# Altium PCB Xds100v2EmuMini.PcbDoc
Units mil, origin at the board's own origin, x right, y up, seen from the top; angles counter-clockwise.
Board outline 1419 x 798.73 mil, 4 copper layers (Top Layer, GND, POWER, Bottom Layer), stack 62.967 mil thick; 42 components, 43 nets, 175 pads, 90 vias.
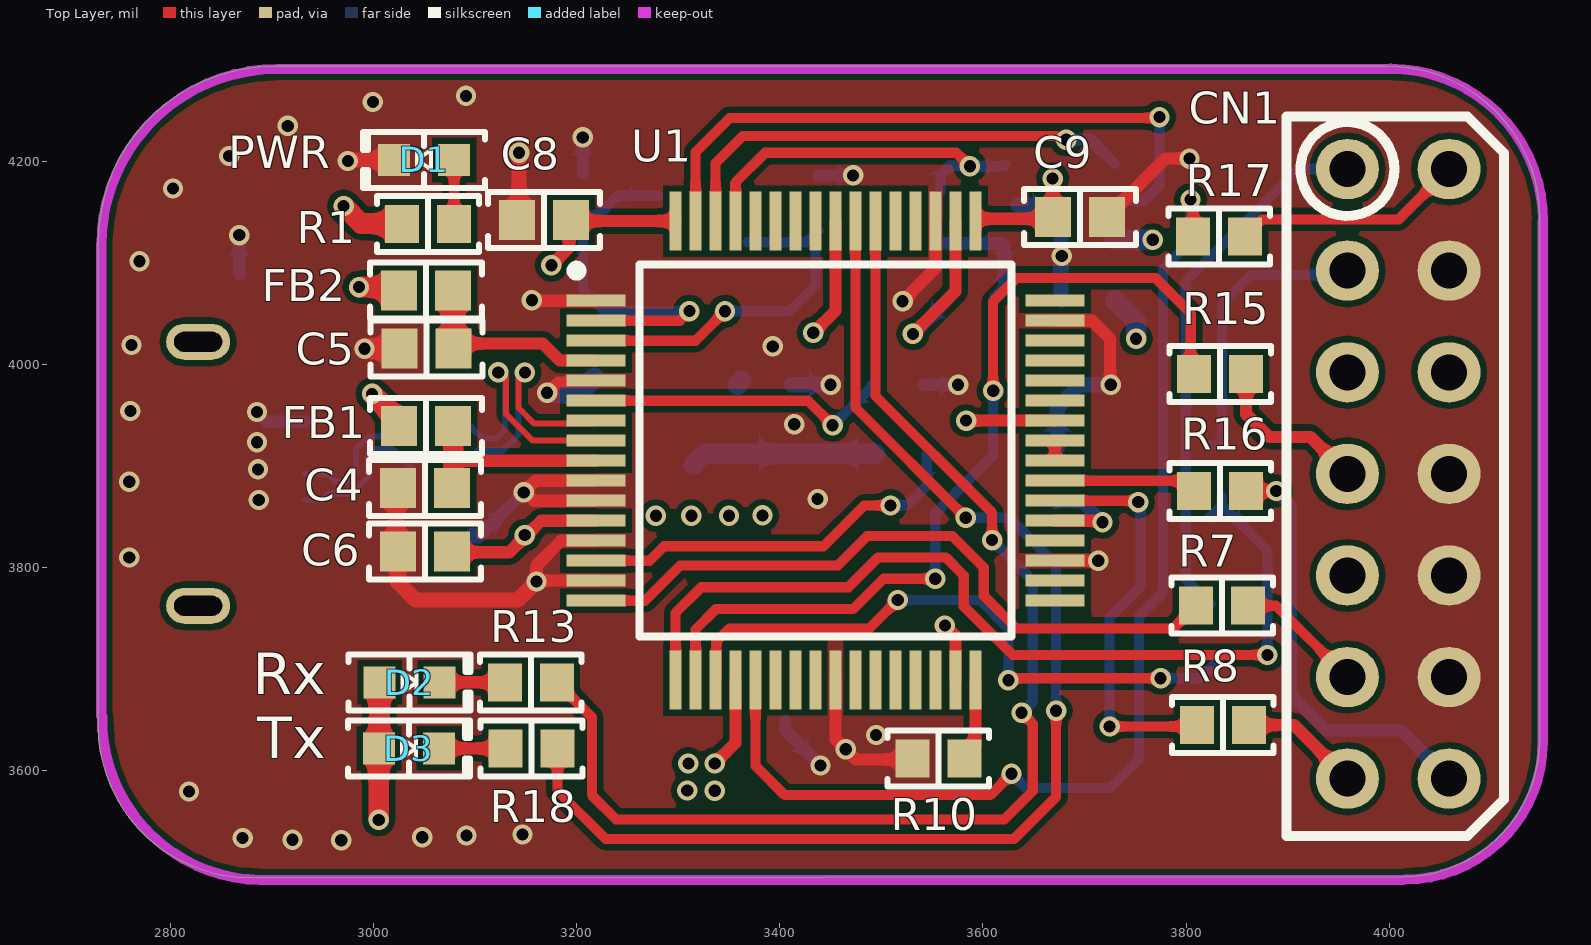
[diagram p0: Top Layer view]
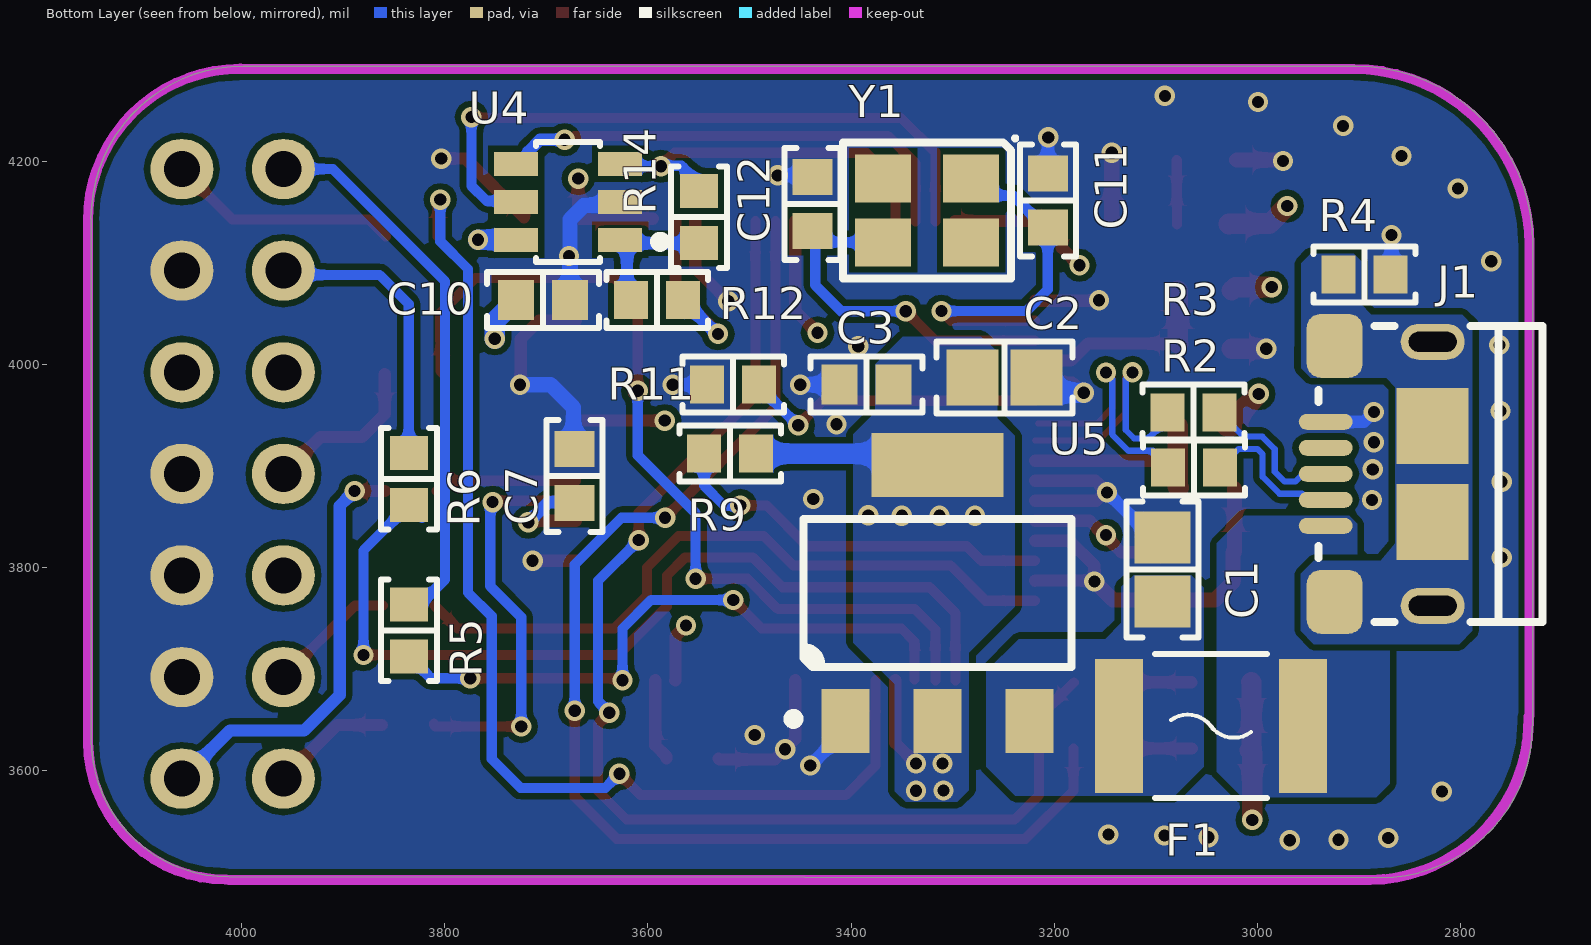
[diagram p1: Bottom Layer view, seen from below]
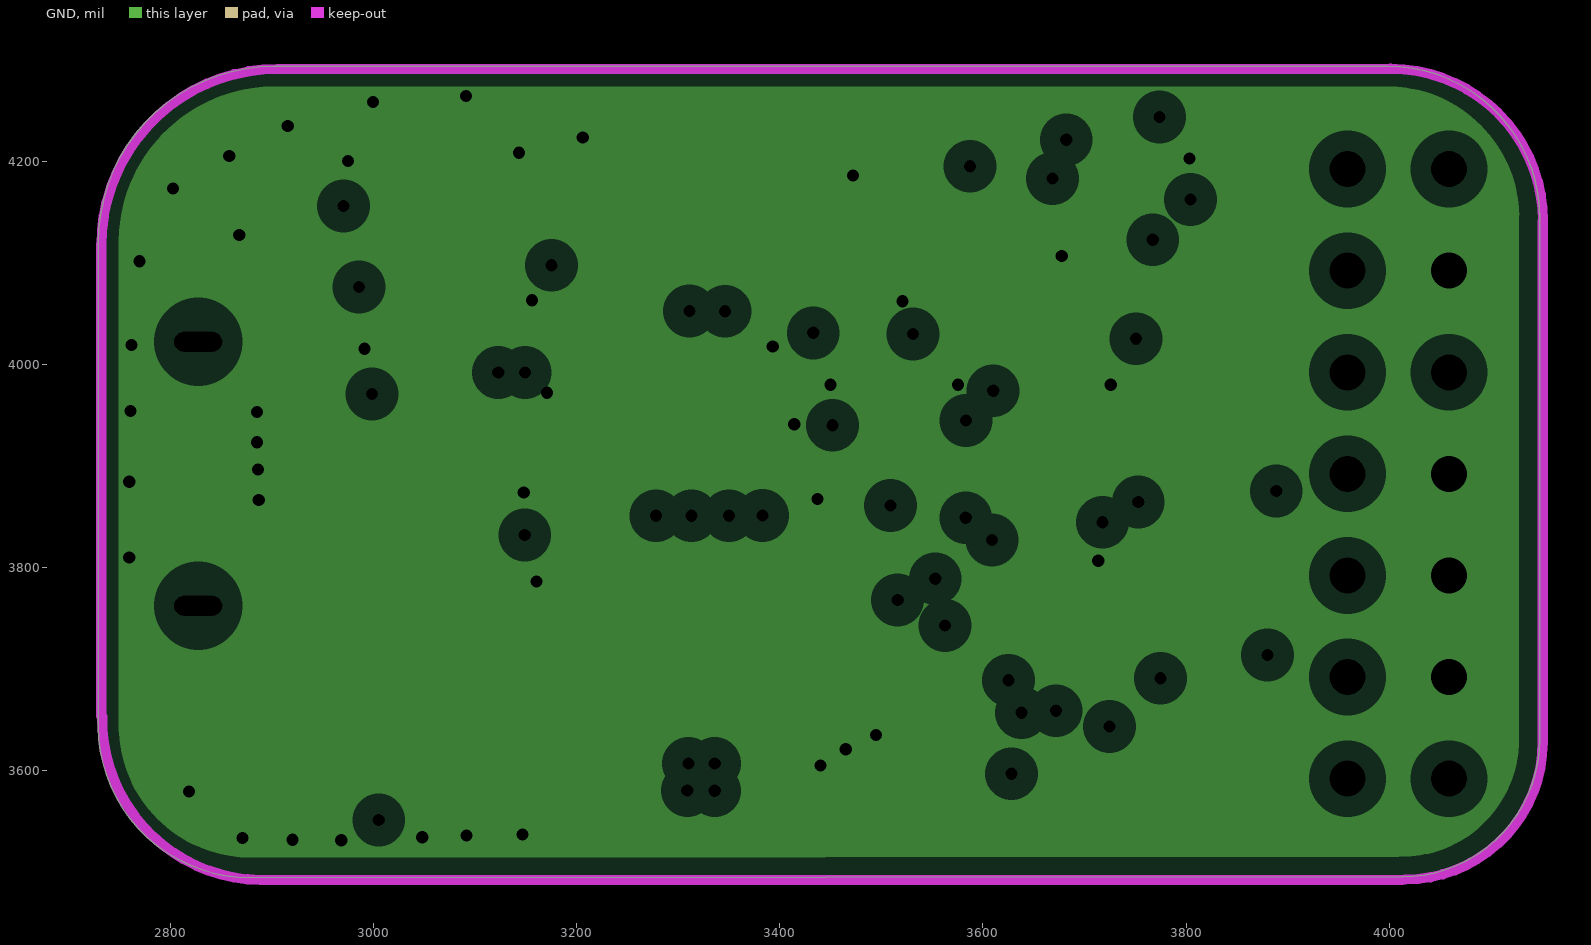
[diagram p2: GND, clearances drawn from the general rule]
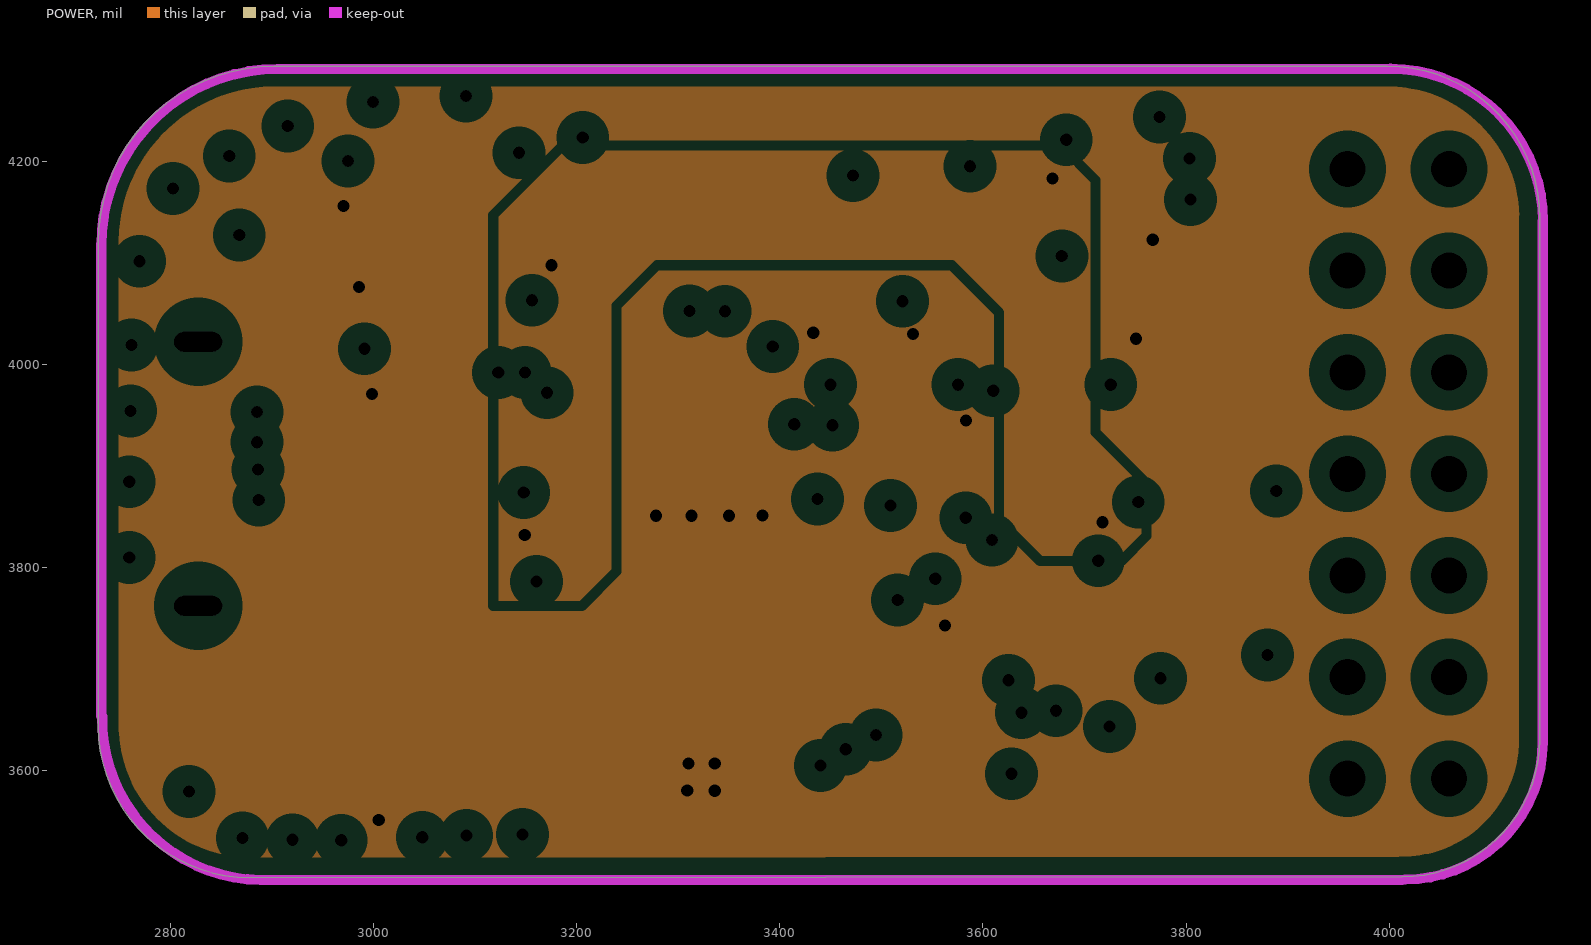
[diagram p3: POWER, clearances drawn from the general rule]
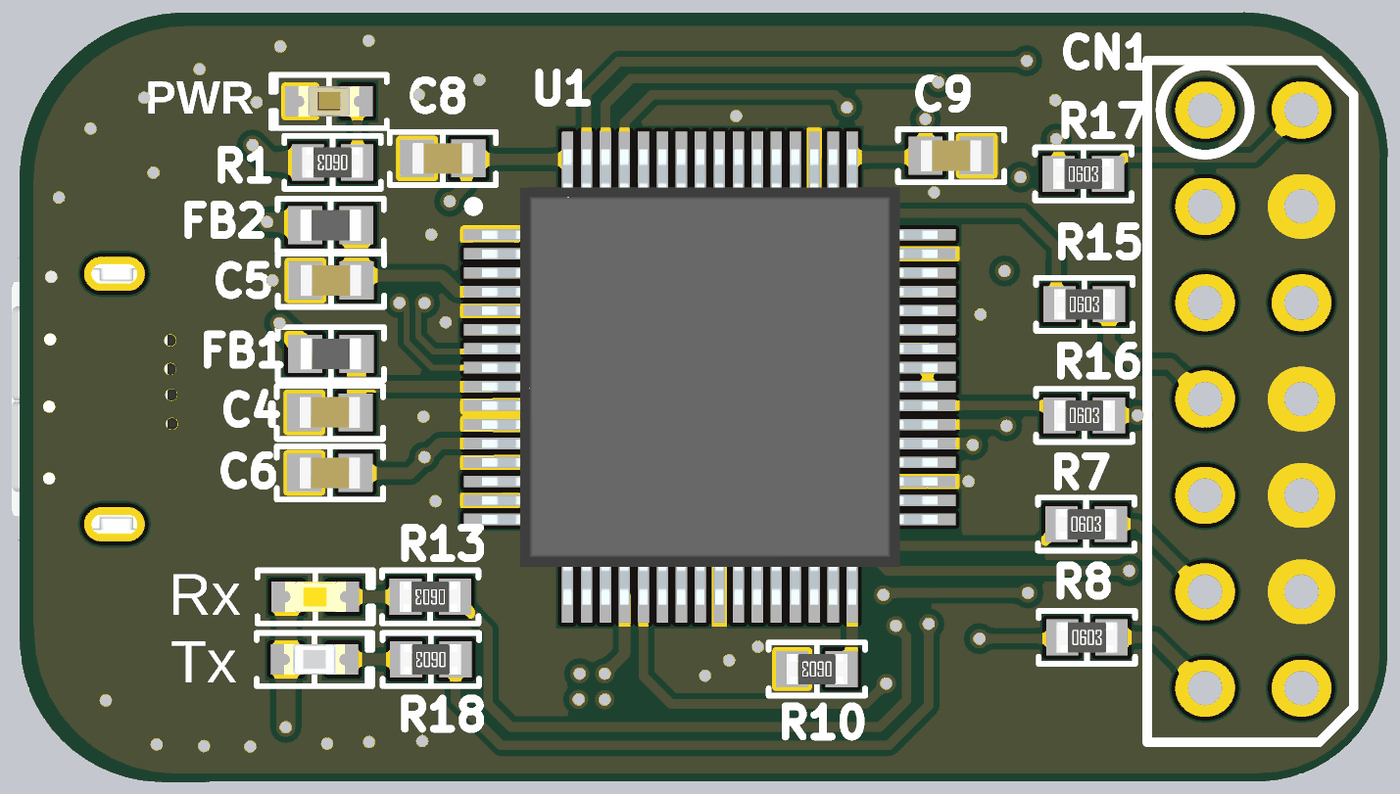
[diagram p4: 3D render of the assembled board from above, using the file's embedded part models]
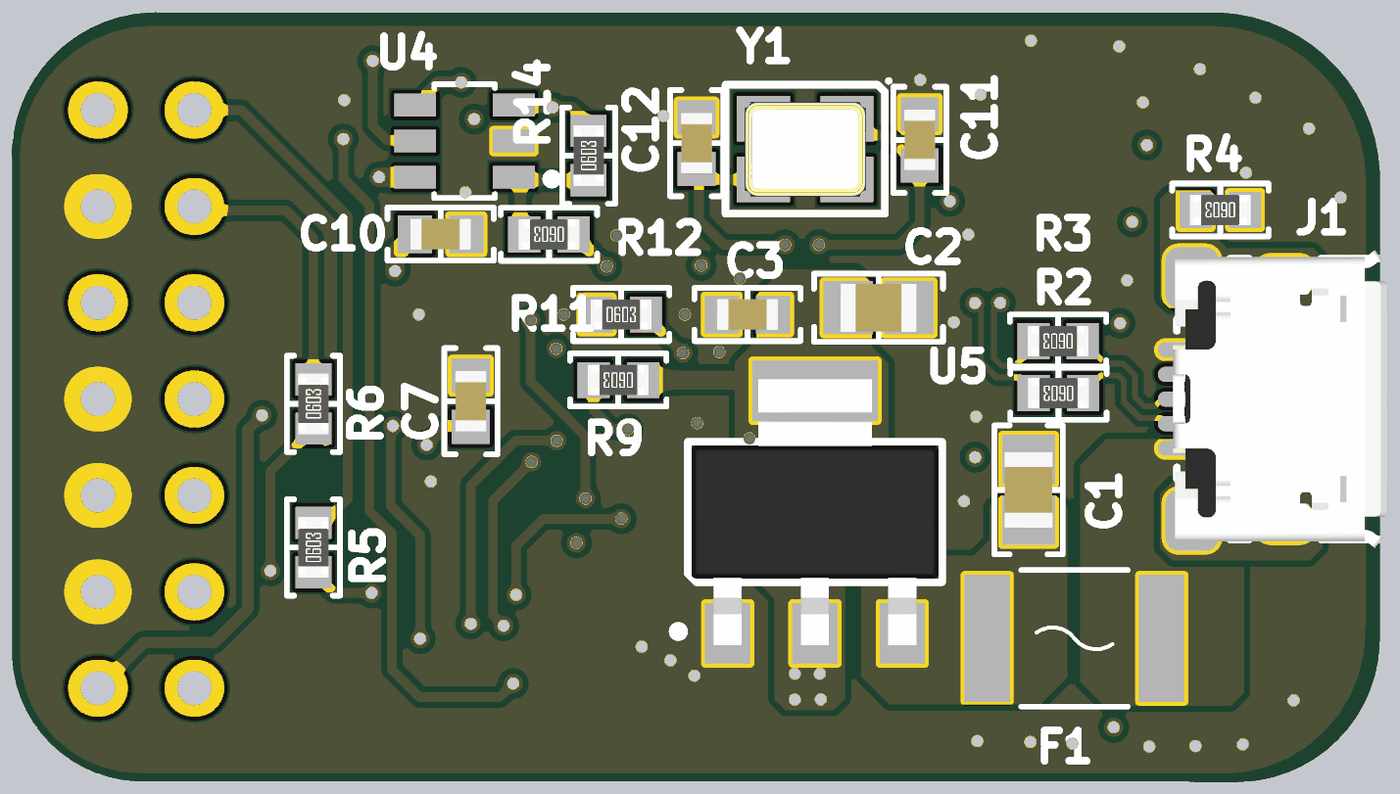
[diagram p5: 3D render of the assembled board from below, using the file's embedded part models]

## Layer stack, top to bottom
Top Solder: solder mask 0.4, Solder Resist, Dk 3.5
Top Layer: signal copper 1.4
Dielectric 2: prepreg 2.8, PP-006, Dk 4.1
GND: plane copper 1.3778, net AGND
Dielectric 1: dielectric 51.811, FR-4, Dk 4.8
POWER: plane copper 1.3778, net (Multiple Nets)
Dielectric 3: prepreg 2.8, PP-006, Dk 4.1
Bottom Layer: signal copper 1.4
Bottom Solder: solder mask 0.4, Solder Resist, Dk 3.5

## Board outline
2878.5,3494.77 cw(c2878.5,3643.96) 2729.3,3643.96 2729.1,3643.96 2729.1,4120.81 2729.12,4119.91 cw(c2902.61,4119.91) 2902.61,4293.4 3998.1,4293.4 3998.1,4293.5 cw(c3998.1,4143.5) 4148.1,4143.5 4147.8,4143.5 4147.8,3630.9 cw(c4012.4,3630.9) 4012.4,3495.5

## Design rules (kind name [scope] priority, off if disabled: settings)
Clearance [All] p1: gap=6 ignorepadtopadclearanceinfootprint=TRUE
ComponentClearance [All] p1: gap=10 collisioncheckmode=3 verticalgap=100000 showdistances=FALSE
MinimumSolderMaskSliver [All] p1: minsoldermaskwidth=-1
PlaneClearance [All] p1: clearance=20
PlaneConnect [All] p1: planeconnectstyle=Direct reliefexpansion=20 reliefentries=4 reliefconductorwidth=10 reliefairgap=10
PolygonConnect [All] p1: connectstyle=Direct reliefconductorwidth=10 reliefentries=4 polygonreliefangle="90 Angle" airgapwidth=10
RoutingVias [All] p1: holewidth=12 width=20 viastyle="Through Hole" minholewidth=8 minwidth=16 maxholewidth=28 maxwidth=50
SilkToSilkClearance [All] p1: silktosilkclearance=-1
SilkToSolderMaskClearance [IsPad] p1: minsilkscreentomaskgap=-1 clearancetoexposedcopper=TRUE
SolderMaskExpansion [All] p1: expansion=4
Width [All] p1: maxlimit=50 minlimit=6 preferedwidth=10
24 further rules are at their usual default settings.

## Components (designator, comment, footprint, x,y, rotation, side; value= is the part's Value field where it differs from the comment)
C1 "#NAME?" "CAP 0805_2012" 3093.5,3798 r270 bottom value=10μF
C2 "#NAME?" "CAP 0805_2012" 3249.1,3987 r0 bottom value=10μF
C3 "0.1µF" "CAP 0603_1608" 3385,3980 r180 bottom value=0.1μF
C4 "4.7uF" "CAP 0603/1608" 3051,3878.4 r0 top
C5 "4.7uF" "CAP 0603/1608" 3052.1,4015.4 r180 top
C6 "100nF" "CAP 0603/1608" 3051,3815.6 r0 top
C7 "100nF" "CAP 0603/1608" 3672,3890 r270 bottom
C8 "100nF" "CAP 0603/1608" 3168,4142 r0 top
C9 "3.3uF" "CAP 0603/1608" 3695.3,4144.8 r180 top
C10 "100nF" "CAP 0603/1608" 3703.3,4063.4 r0 bottom
C11 "36pF" "CAP 0603/1608" 3206.3,4161.27 r270 bottom
C12 "36pF" "CAP 0603/1608" 3437.8,4157.8 r270 bottom
CN1 "JTAG" JTAG调试接口 4008.7,3741.2 r270 top
D1 "#NAME?" "LED 0603_1608 RED" 3049.9,4201.2 r180 top value=Red
D2 "#NAME?" "LED 0603_1608 YELLOW" 3035.71,3687 r0 top value=Yellow
D3 "#NAME?" "LED 0603_1608 GREEN" 3035,3622 r0 top value=Green
F1 "MF-MSMF050-2" FUSM4632X85N 3045.9,3643.9 r0 bottom value=500mA
FB1 "#NAME?" "FER 0603_1608" 3051.9,3939.2 r180 top value="470 Ohms @ 100MHz"
FB2 "#NAME?" "FER 0603_1608" 3051.8,4072.7 r180 top value="470 Ohms @ 100MHz"
J1 "USB Micro" "FCI USB 10118193-0001LF" 2829.47,3892.26 r270 bottom locked
R1 "680R" "RES 0603/1608" 3053.7,4137.9 r180 top
R2 "0R" "RES 0603/1608" 3062.5,3898.3 r0 bottom
R3 "0R" "RES 0603/1608" 3062.9,3952.4 r0 bottom
R4 "0R" "RES 0603/1608" 2894.6,4088.5 r0 bottom
R5 "NOT_INSTALLED" "RES 0603/1608" 3835.2,3738.2 r90 bottom
R6 "NOT_INSTALLED" "RES 0603/1608" 3835.2,3887.2 r90 bottom
R7 "NOT_INSTALLED" "RES 0603/1608" 3835.3,3762.5 r0 top
R8 "NOT_INSTALLED" "RES 0603/1608" 3836.1,3644.9 r0 top
R9 "1K" "RES 0603/1608" 3519,3912 r0 bottom
R10 "1K" "RES 0603/1608" 3556,3612 r180 top
R11 "12K" "RES 0603/1608" 3516,3980 r180 bottom
R12 "10K" "RES 0603/1608" 3590.9,4063.2 r0 bottom
R13 "680R" "RES 0603/1608" 3155,3687 r180 top
R14 "2K2" "RES 0603/1608" 3549.8,4144.9 r90 bottom
R15 "NOT_INSTALLED" "RES 0603/1608" 3833.4,3990.6 r0 top
R16 "NOT_INSTALLED" "RES 0603/1608" 3833.4,3875.3 r0 top
R17 "NOT_INSTALLED" "RES 0603/1608" 3832.4,4125.9 r0 top
R18 "680R" "RES 0603/1608" 3155.59,3622 r180 top
U1 "FT2232HQ-REEL" LQFP64_N 3445,3915 r0 top locked value=FT2232HL-REEL
U4 "93LC56BT-I/OT" SOT23-6 3678.5,4160 r0 bottom locked
U5 "AMS1117-3.3" "DIODES SOT-223" 3315,3775 r90 bottom
Y1 "#NAME?" "NDK NX3225SA" 3325.1,4151.6 r0 bottom value=12MHz

## Footprints (in the part's own frame and the unit in brackets; to place one, negate y for a bottom-side part, rotate by r counter-clockwise, add the part's x,y. Pads: shape width x height; smd on the part's side, far side on the other; paste and mask are expansions set on the pad)
"CAP 0603/1608" [mm] "Chip Capacitor, 2-Leads, Body 1.60x0.80mm, IPC Medium Density"
  rect 0.9x1 smd: 1(-0.675,0) 2(0.675,0)
  silkscreen extent -1.4,-0.7 1.4,0.7, body extent -0.8,-0.41 0.8,0.41, height 0.82
"CAP 0603_1608" [mm] "Chip Capacitor, 2-Leads, Body 1.60x0.80mm, IPC Medium Density"
  rect 0.9x1 smd: 1(-0.675,0) 2(0.675,0)
  silkscreen extent -1.4,-0.7 1.4,0.7, body extent -0.8,-0.41 0.8,0.41, height 0.82
"CAP 0805_2012" [mm] "Chip Capacitor, 2-Leads, Body 2.00x1.20mm, IPC Medium Density"
  rect 1.3x1.4 smd: 1(-0.8,0) 2(0.8,0)
  silkscreen extent -1.7,-0.9 1.7,0.9, body extent -1,-0.64 1,0.64, height 1.26
"DIODES SOT-223" [mm] "SOT223, 4-Leads, Body 6.50x7.00mm (avg), Pitch 2.30mm, IPC Medium Density"
  rect 1.6x1.2 smd: 1(-3.2,2.3) 2(-3.2,0) 3(-3.2,-2.3)
  rect 1.6x3.3 smd: 4(3.2,0)
  silkscreen extent -3.27,-3.35 1.85,3.73, body extent -3.52,-3.25 3.5,3.25, height 1.8
"FCI USB 10118193-0001LF" [mm] "USB 2.0 Type B Micro"
  oval 0.4x1.35 smd: 1(1.3,-2.625) 2(0.65,-2.625) 3(0,-2.625) 4(-0.65,-2.625) 5(-1.3,-2.625)
  oval 0.9x1.6 hole 0.5 slot 1.2 at 90 deg: S(-3.3,0.05) S(3.3,0.05)
  rrect50% 1.6x1.4 smd: S(-3.2,-2.4) S(3.2,-2.4)
  rect 1.9x1.8 smd: S(-1.2,0.05) S(1.2,0.05)
  silkscreen extent -3.7,-2.8 3.7,2.8, body extent -3.93,-2.9 3.93,2.76, height 2.78
"FER 0603_1608" [mm] "Chip Ferrite, 2-Leads, Body 1.60x0.80mm, IPC Medium Density"
  rect 0.9x1 smd: 1(-0.675,0) 2(0.675,0)
  silkscreen extent -1.4,-0.7 1.4,0.7, body extent -0.8,-0.41 0.8,0.41, height 0.82
FUSM4632X85N [mm]
  rect 1.2x3.35 smd paste+0 mask+0.1: 1(-2.3,0) 2(2.3,0)
  silkscreen extent -1.4,-1.8 1.4,1.8
JTAG调试接口 [mil]
  oval 59.06x62 hole 35.43: 1(-451,-50) 2(-451,50) 3(-351,-50) 4(-351,50) 5(-251,-50) 6(-251,50) 7(-151,-50) 8(-151,50) 9(-51,-50) 10(-51,50) 11(49,-50) 12(49,50) 13(149,-50) 14(149,50)
"LED 0603_1608 GREEN" [mm] "Chip Diode, 2-Leads, Body 1.60x0.80mm, IPC Medium Density"
  rect 0.8x0.8 smd: 1(-0.75,0) 2(0.75,0)
  silkscreen extent -1.52,-0.7 1.52,0.7, body extent -0.8,-0.4 0.8,0.4, height 0.53
"LED 0603_1608 RED" [mm] "Chip Diode, 2-Leads, Body 1.60x0.80mm, IPC Medium Density"
  rect 0.8x0.8 smd: 1(-0.75,0) 2(0.75,0)
  silkscreen extent -1.52,-0.7 1.52,0.7, body extent -0.8,-0.4 0.8,0.4, height 0.53
"LED 0603_1608 YELLOW" [mm] "Chip Diode, 2-Leads, Body 1.60x0.80mm, IPC Medium Density"
  rect 0.8x0.8 smd: 1(-0.75,0) 2(0.75,0)
  silkscreen extent -1.52,-0.7 1.52,0.7, body extent -0.8,-0.4 0.8,0.4, height 0.53
LQFP64_N [mm]
  rect 1.475x0.3 smd: 1(-5.738,3.75) 2(-5.738,3.25) 3(-5.738,2.75) 4(-5.738,2.25) 5(-5.738,1.75) 6(-5.738,1.25) 7(-5.738,0.75) 8(-5.738,0.25) 9(-5.738,-0.25) 10(-5.738,-0.75) 11(-5.738,-1.25) 12(-5.738,-1.75) 13(-5.738,-2.25) 14(-5.738,-2.75) 15(-5.738,-3.25) 16(-5.738,-3.75) 33(5.738,-3.75) 34(5.738,-3.25) 35(5.738,-2.75) 36(5.738,-2.25) 37(5.738,-1.75) 38(5.738,-1.25) 39(5.738,-0.75) 40(5.738,-0.25) 41(5.738,0.25) 42(5.738,0.75) 43(5.738,1.25) 44(5.738,1.75) 45(5.738,2.25) 46(5.738,2.75) 47(5.738,3.25) 48(5.738,3.75)
  rect 0.3x1.475 smd: 17(-3.75,-5.738) 18(-3.25,-5.738) 19(-2.75,-5.738) 20(-2.25,-5.738) 21(-1.75,-5.738) 22(-1.25,-5.738) 23(-0.75,-5.738) 24(-0.25,-5.738) 25(0.25,-5.738) 26(0.75,-5.738) 27(1.25,-5.738) 28(1.75,-5.738) 29(2.25,-5.738) 30(2.75,-5.738) 31(3.25,-5.738) 32(3.75,-5.738) 49(3.75,5.738) 50(3.25,5.738) 51(2.75,5.738) 52(2.25,5.738) 53(1.75,5.738) 54(1.25,5.738) 55(0.75,5.738) 56(0.25,5.738) 57(-0.25,5.738) 58(-0.75,5.738) 59(-1.25,5.738) 60(-1.75,5.738) 61(-2.25,5.738) 62(-2.75,5.738) 63(-3.25,5.738) 64(-3.75,5.738)
  silkscreen extent -6.35,-4.65 4.65,4.65, body extent -6,-6 6,6, height 1.6
"NDK NX3225SA" [mm] "Crystal, 4-Leads, Body 2.50x3.20mm, Pitch 2.20mm, IPC Medium Density"
  rect 1.4x1.2 smd: 1(-1.1,-0.8) 2(1.1,-0.8) 3(1.1,0.8) 4(-1.1,0.8)
  silkscreen extent -2.25,-1.85 2.1,1.7, body extent -1.61,-1.26 1.61,1.26, height 0.6
"RES 0603/1608" [mm] "Chip Resistor, 2-Leads, Body 1.60x0.80mm, IPC Medium Density"
  rect 0.85x0.95 smd: 1(-0.65,0) 2(0.65,0)
  silkscreen extent -1.27,-0.7 1.27,0.7, body extent -0.8,-0.4 0.8,0.4, height 0.45
SOT23-6 [mm]
  rect 1.1x0.6 smd mask+0.1: 1(-1.3,0.95) 2(-1.3,0) 3(-1.3,-0.95) 4(1.3,-0.95) 5(1.3,0) 6(1.3,0.95)
  silkscreen extent -2.35,-1.5 0.8,1.5

## Part data
C1 C2: library part CL21B106KOQNNNG, "CAP CER 10UF 16V X7R 0805", Capacitance=10μF, Device Package="0805 (2012 Metric)", Manufacturer="Samsung Electro-Mechanics", Operating Temperature="-55°C ~ 125?", Supplier Part Number 1=1276-6472-1-ND, Temperature Coefficient=X7R, Tolerance=±10%, Voltage - Rated=16V, Applications="General Purpose", ComponentLink1Description=Datasheet, ComponentLink1URL=http://www.samsungsem.com/kr/support/product-search/mlcc/CL21B106KOQNNNG.jsp, ComponentLink2Description="DigiKey Link", ComponentLink2URL=http://digikey.com/product-detail/en/samsung-electro-mechanics/CL21B106KOQNNNG/1276-6472-1-ND/5958100, LastUpdated="2020/1/21 0:02:49", Lifecycle Status=Active, Minimum Order=1, Mounting Type="Surface Mount, MLCC", Package / Case="0805 (2012 Metric)", Packaging=TapeAndReel, PartId=13168, Part Number=CL21B106KOQNNNG, Part Status=Active, Price=0.06, Series=CL, Size / Dimension="0.079\" L x 0.049\" W (2.00mm x 1.25mm)", Supplier 1=DigiKey, Thickness (Max)="0.055\" (1.40mm)"
C3: library part GCJ188R71C104KA01D, "CAP CER 0.1UF 16V X7R 0603", Capacitance=0.1μF, Device Package="0603 (1608 Metric)", Manufacturer="Murata Electronics", Operating Temperature="-55°C ~ 125?", Ratings=AEC-Q200, Supplier Part Number 1=490-5796-1-ND, Temperature Coefficient=X7R, Tolerance=±10%, Voltage - Rated=16V, Applications="Automotive, Boardflex Sensitive", ComponentLink1Description=Datasheet, ComponentLink1URL=https://www.murata.com/~/media/webrenewal/support/library/catalog/products/capacitor/mlcc/c03e.ashx?la=en-us, ComponentLink2Description="DigiKey Link", ComponentLink2URL=http://digikey.com/product-detail/en/murata-electronics/GCJ188R71C104KA01D/490-5796-1-ND/2783830, Features="Soft Termination", LastUpdated="2020/1/21 0:01:37", Lifecycle Status=Active, Minimum Order=1, Mounting Type="Surface Mount, MLCC", Package / Case="0603 (1608 Metric)", Packaging=TapeAndReel, PartId=17928, Part Number=GCJ188R71C104KA01D, Part Status=Active, Price=0.05, Series=GCJ, Size / Dimension="0.063\" L x 0.031\" W (1.60mm x 0.80mm)", Supplier 1=DigiKey, Thickness (Max)="0.035\" (0.90mm)"
C4 C5: library part 1004001100218, "CAP,4.7UF,+/-20%,X5R,6.3V,SMD0603", Case/Package=0603, Case Code (Metric)=1608, Dielectric=X5R, Dielectric Material=Ceramic, Manufacturer=KEMET, Manufacturer Part Number=C0603C475M8PACTU, Max Operating Temperature=85°C, Min Operating Temperature=-55°C, Package Quantity=1, Supplier Part Number 1=399-9100-1-ND, Tolerance=20%, Voltage Rating=10V, Capacitance=4.7uF, Case Code (Imperial)=0603, ComponentLink1Description=https://datasheet.ciiva.com/28614/1918694-28614758.pdf?src-supplier=Element14, ComponentLink1URL=https://datasheet.ciiva.com/28614/1918694-28614758.pdf?src-supplier=Element14, Contact Plating=Tin,Matte, Depth=0.8mm, Dissipation Factor=5%, Height=0.8mm, Lead Free="Lead Free", Length=1.6mm, Mount="Surface Mount", Number of Pins=2, Packaging="Tape and Reel", Pricing 1="1 = 0.30000, 10 = 0.20900, 100 = 0.11830, 500 = 0.08350, 1000 = 0.07307 (USD)", REACH SVHC="No SVHC", ROHS=Yes, Stock 1=160821, Supplier 1=Digi-Key, Termination=SMD/SMT, Thickness=0.034inch, Voltage Rating (DC)=10V, Width=0.8mm
C6 C7 C8: library part 1004001100187, "CAP,100NF(0.1uf),+/-10%,X5R,16V,SMD0603"
C9: library part 1004001100252, "CAP,3.3uF,+/-10%,X5R,10V,SMD0603", Manufacturer=MURATA, Manufacturer Part Number=GRM188R61A335KE15D, Rating=10%, Embest PN=1004001100252, Part Type="Ceramic Capacitor"
C10: library part 1004001100187, "CAP,100NF(0.1uf),+/-10%,X5R,10V,SMD0603", Manufacturer=MURATA, Manufacturer Part Number=GRM155R61A104KA01D, Rating=10%, Embest PN=1004001100187, Part Type="Ceramic Capacitor"
C11 C12: library part 1004001100255, "CAP,36pF,+/-5%,C0G,50V,SMD0603", Manufacturer=MURATA, Manufacturer Part Number=GRM1555C1H360JA01D, Rating=5%, Embest PN=1004001100255, Part Type="Ceramic Capacitor"
CN1: library part "Header 7X2", "Header, 14-Pin", A规格=2.
D1: library part SML-LXFM0603SIC-TR, "LED RED CLEAR 0603 SMD", Color=Red, Current - Test=20mA, Device Package="0603 (1608 Metric)", Lens Color=Colorless, Manufacturer="Lumex Opto/Components Inc.", Millicandela Rating=150mcd, Supplier Part Number 1=67-2194-1-ND, Voltage - Forward (Vf) (Typ)=2V, ComponentLink1Description=Datasheet, ComponentLink1URL=https://www.lumex.com/content/files/ProductAttachment/SML-LXFM0603SIC-TR.pdf, ComponentLink2Description="DigiKey Link", ComponentLink2URL=http://digikey.com/product-detail/en/lumex-opto-components-inc/SML-LXFM0603SIC-TR/67-2194-1-ND/4172841, Configuration=Standard, Height (Max)=1.10mm, LastUpdated="2020/1/21 3:13:21", Lens Size="1.10mm x 0.80mm", Lens Style="Rectangle with Flat Top", Lens Transparency=Clear, Lifecycle Status=Active, Minimum Order=1, Mounting Type="Surface Mount", Package / Case="0603 (1608 Metric)", Packaging=TapeAndReel, PartId=444, Part Number=SML-LXFM0603SIC-TR, Part Status=Active, Price=0.16, Series=-, Size / Dimension="1.60mm L x 0.80mm W", Supplier 1=DigiKey, Supplier Device Package="0603 (1608 Metric)", Viewing Angle=120°, Wavelength - Peak=636nm
D2: library part SML-D12Y8WT86, "LED YELLOW DIFFUSED 0603 SMD", Color=Yellow, Current - Test=20mA, Device Package="0603 (1608 Metric)", Lens Color=White, Manufacturer="Rohm Semiconductor", Millicandela Rating=63mcd, Supplier Part Number 1=511-1582-1-ND, Voltage - Forward (Vf) (Typ)=2.2V, ComponentLink1Description=Datasheet, ComponentLink1URL=https://www.rohm.com/datasheet/SML-D12V8W, ComponentLink2Description="DigiKey Link", ComponentLink2URL=http://digikey.com/product-detail/en/rohm-semiconductor/SML-D12Y8WT86/511-1582-1-ND/1641814, Configuration=Standard, Height (Max)=0.65mm, LastUpdated="2020/1/21 3:15:04", Lens Size="1.20mm x 0.80mm", Lens Style="Rectangle with Flat Top", Lens Transparency=Diffused, Lifecycle Status=Active, Minimum Order=1, Mounting Type="Surface Mount", Package / Case="0603 (1608 Metric)", Packaging=TapeAndReel, PartId=110, Part Number=SML-D12Y8WT86, Part Status=Active, Price=0.06, Series=EXCELED?, Size / Dimension="1.60mm L x 0.80mm W", Supplier 1=DigiKey, Supplier Device Package="0603 (1608 Metric)", Wavelength - Dominant=590nm
D3: library part SML-D13FWT86, "LED GREEN DIFFUSED 0603 SMD", Color=Green, Current - Test=20mA, Device Package="0603 (1608 Metric)", Lens Color=White, Manufacturer="Rohm Semiconductor", Millicandela Rating=22mcd, Supplier Part Number 1=SML-D13FWT86CT-ND, Voltage - Forward (Vf) (Typ)=2.1V, ComponentLink1Description=Datasheet, ComponentLink1URL=//media.digikey.com/pdf/Data%20Sheets/Rohm%20PDFs/SML-D13(A)%20Series.pdf, ComponentLink2Description="DigiKey Link", ComponentLink2URL=http://digikey.com/product-detail/en/rohm-semiconductor/SML-D13FWT86/SML-D13FWT86CT-ND/9952108, Configuration=Standard, Height (Max)=0.65mm, LastUpdated="2020/1/21 3:12:14", Lens Size="1.20mm x 0.80mm", Lens Style="Rectangle with Flat Top", Lens Transparency=Diffused, Lifecycle Status=Active, Minimum Order=1, Mounting Type="Surface Mount", Package / Case="0603 (1608 Metric)", Packaging=TapeAndReel, PartId=591, Part Number=SML-D13FWT86, Part Status=Active, Price=0.12, Series="SML-D13 (A)", Size / Dimension="1.60mm L x 0.80mm W", Supplier 1=DigiKey, Supplier Device Package="0603 (1608 Metric)", Wavelength - Dominant=564nm
F1: library part 1007001100029, "PTC RESETTABLE .50A 15V 1812", Manufacturer=BOURNS, Embest PN=1007001100029, Manufacturer Part Number=MF-MSMF050-2, Part Type=Polyswitch
FB1 FB2: library part BLM18BB471SN1D, "FERRITE BEAD 470 OHM 0603 1LN", Current Rating (Max)=300mA, DC Resistance (DCR) (Max)=850mOhm, Device Package="0603 (1608 Metric)", Impedance @ Frequency="470 Ohms @ 100MHz", Manufacturer="Murata Electronics", Operating Temperature="-55°C ~ 125?", Supplier Part Number 1=490-1021-1-ND, ComponentLink1Description=Datasheet, ComponentLink1URL=https://www.murata.com/en-us/products/productdata/8796738650142/ENFA0003.pdf, ComponentLink2Description="DigiKey Link", ComponentLink2URL=http://digikey.com/product-detail/en/murata-electronics/BLM18BB471SN1D/490-1021-1-ND/584469, Filter Type="Signal Line", Height (Max)="0.037\" (0.95mm)", LastUpdated="2020/1/21 2:28:20", Lifecycle Status=Active, Minimum Order=1, Mounting Type="Surface Mount", Number of Lines=1, Package / Case="0603 (1608 Metric)", Packaging=TapeAndReel, PartId=596, Part Number=BLM18BB471SN1D, Part Status=Active, Price=0.02, Series="EMIFIL?, BLM18", Size / Dimension="0.063\" L x 0.032\" W (1.60mm x 0.80mm)", Supplier 1=DigiKey
J1: library part "USB 2.0 Type B Micro"
R1 R13: library part 1003001100490, "RES,680R,+/-5%,1/10W,SMD0603"
R2 R3 R4: library part 1003001100001, "RES,0R,+/-5%,1/10W,SMD0603"
R5 R6 R7 R8 R15 R16 R17: library part 1003001100325, "RES,0R,+/-5%,1/10W,SMD0603"
R9: library part 1003001100034, "RES,1K,+/-5%,1/10W,SMD0603"
R10: library part 1003001100034, "RES,1K,+/-1%,1/10W,SMD0603"
R11: library part 1003001100075, "RES,12K,+/-1%,1/10W,SMD0603"
R12: library part 1003001100071, "RES,10K,+/-1%,1/10W,SMD0603"
R14: library part 1003001100045, "RES,2K2,+/-1%,1/10W,SMD0603"
R18: library part 1003001100490, "RES,680R,+/-1%,1/10W,SMD0603"
U1: library part 1002010100084, "IC,Dual High Speed USB to Multipurpose UART/FIFO IC,FT2232HL-REEL,LQFP-64,SMD", Manufacturer=FTDI, Manufacturer Part Number=FT2232HL-REEL, Embest PN=1002010100084, Part Type=Interface
U4: library part 1002003100163, "IC,EEPROM Serial-Microwire 2K-Bit 128 x 16 2MHz,93LC56BT-I/OT,SOT-23-6,SMD", Manufacturer=MICROCHIP, Embest PN=1002003100163, Manufacturer Part Number=93LC56BT-I/OT, Part Type=Memory
U5: library part AMS1117, "电源转换5Vto3.3V"
Y1: library part NX3225SA-12MHZ-STD-CSR-6, "CRYSTAL 12.0000MHZ 8PF SMD", Device Package="4-SMD, No Lead", ESR (Equivalent Series Resistance)="100 Ohms", Frequency=12MHz, Frequency Stability=±25ppm, Frequency Tolerance=±15ppm, Load Capacitance=8pF, Manufacturer="NDK America, Inc.", Operating Mode=Fundamental, Operating Temperature="-40°C ~ 85?", Supplier Part Number 1=644-1180-1-ND, ComponentLink1Description=Datasheet, ComponentLink1URL=http://www.ndk.com/images/products/catalog/c_NX3225SA_e.pdf, ComponentLink2Description="DigiKey Link", ComponentLink2URL=http://digikey.com/product-detail/en/ndk-america-inc/NX3225SA-12MHZ-STD-CSR-6/644-1180-1-ND/3125569, Height - Seated (Max)="0.024\" (0.60mm)", LastUpdated="2020/1/21 3:23:16", Lifecycle Status=Active, Minimum Order=1, Mounting Type="Surface Mount", Package / Case="4-SMD, No Lead", Packaging=TapeAndReel, PartId=590, Part Number=NX3225SA-12MHZ-STD-CSR-6, Part Status=Active, Price=0.45, Series=NX3225SA, Size / Dimension="0.126\" L x 0.098\" W (3.20mm x 2.50mm)", Supplier 1=DigiKey, Type="MHz Crystal"

## Via types
v1: diameter 20, hole 12, Top Layer to Bottom Layer, tented both sides, 90 vias

## Nets (pads, with @x,y where several pads share a name; then routed paths per layer and width w, separated by ;. In a path a pad name is that pad's centre, name@x,y a point inside that pad or via, vN(x,y) a via of type N, cw(c..) or ccw(c..) an arc to the next point about the centre after c; other vN are vias at no path point)
+3V3: 
AGND: C1.1 C2.1 C3.1 C4.1 C5.2 C6.1 C7.1 C8.1 C9.1 C10.1 C11.1 C12.1 CN1.4 CN1.8 CN1.10 CN1.12 D1.2 J1.5 R4.1 R10.2 R11.1 U1.1 U1.5 U1.10 U1.11 U1.13 U1.15 U1.25 U1.35 U1.47 U1.51 U4.2 U5.1 | length 1943.5
  Top Layer w10: v1(3171,3972) 3181.99,3982.99 3218.19,3982.99 U1.5
  Top Layer w12: v1(3156,4063) 3156.36,4062.64 U1.1 ; v1(3160.5,3786.2) v1@3160.5,3787.14 ; U1.15 3219,3787.14 v1@3160.5,3787.14 ; U1.13 3219,3826.32 3184.92,3826.32 3160.5,3801.9 v1@3160.5,3787.14 ; U1.11 3158.38,3865.79 3150.16,3874 v1(3148,3874) 3159.47,3885.47 U1.10 ; U1.25 3454.84,3631.16 3475,3611 3529.41,3611 R10.2 ; v1(3520.9,4062.1) 3553.27,4094.47 U1.51 ; U1.35 v1(3713.4,3806.73) ; U1.47 3671,4042.86 3707.24,4042.86 3725.14,4024.96 3725.14,3980.86 3726,3980 v1(3725.8,3980) ; C9.1@3721.73,4146.62 C9.1@3721.87,4146.77 ; C9.1 3779.57,4202.5 v1(3803.3,4202.5)
  Top Layer w15: v1(2974.9,4200.2) 2975.9,4201.2 D1.2 ; C6.1@3022.53,3815.6 C4.1@3022.53,3877.6 ; C6.1@3024,3815 3024,3785.6 3041.6,3768 3142.3,3768 v1(3160.5,3786.2) ; C8.1 3143.4,4143.97 v1(3143.4,4208.2)
  Top Layer w20: v1@2991.2,4015.5 v1(2991.3,4015.4) C5.2
  Bottom Layer w12: v1(2868,4127.2) 2868,4089.51 R4.1 ; v1(2885.4,3953.1) 2895.06,3943.44 J1.5 ; C1.1@3097.5,3833.5 C1.1 3103.5,3829.5 v1(3148,3874) ; v1(3206,4223.4) 3206.3,4223.1 C11.1 ; U5.1 3405.55,3639.65 v1(3440.1,3605.1) ; C12.1@3437.8,4186 v1(3472.2,4186) ; R11.1 v1(3575.5,3980)
  Bottom Layer w15: C3.1 v1(3450,3980) ; U4.2@3634.72,4156.5 3662.8,4156.5 3676.73,4142.57 C10.1 ; C7.1 3673.2,3917.77 3673.2,3957.5 3695.7,3980 v1(3725.8,3980) v1@3727,3980
  Bottom Layer w20: v1(3171,3972) 3202.6,3972 C2.1
  other v1: 2920.3,3532.1 2968.3,3531.6 2871.3,3533.8 3048.1,3534.6 3091.6,3536.3 3146.7,3537.3 2818.5,3579.5 3464.92,3621.08 3494.8,3635.2 2759.7,3809.8 2887.2,3866.5 3437.2,3867.4 2759.7,3884.4 2886.5,3896.6 2885.4,3923.4 3414.3,3941.1 2760.8,3954.1 3393,4017.7 2761.9,4019.1 2769.8,4101.4 3677.6,4106.7 2802.7,4173 2858.2,4205 2915.7,4234.7 2999.5,4258.2 3091.1,4264.2
D+: R3.2 U1.8 | length 254.3
  Top Layer w6: v1@3130.4,3988 3130.4,3951.2 3156.76,3924.84 U1.8
  Bottom Layer w6: R3.2@3088.49,3950.7 3088.49,3946.11 3107.6,3927 3121.23,3927 3129.6,3935.37 3129.6,3985.4 v1(3122.9,3992.1) v1@3122,3993
D-: R2.2 U1.7 | length 257.4
  Top Layer w6: v1@3149,3999 3142.8,3992.8 3142.8,3957.2 3158.38,3941.62 U1.7@3216.19,3941.62
  Bottom Layer w6: R2.2 3088.09,3900.27 3102.73,3914.9 3127.1,3914.9 3142.6,3930.4 3142.6,3931.4 3142.9,3931.7 3142.9,3985.7 v1(3149.1,3991.9)
FTDI_1V8: C6.2 C7.2 C8.2 C9.2 U1.12 U1.37 U1.49 U1.64 | length 529
  Top Layer w12: C6.2@3075.67,3815 3134,3815 3165.1,3846.1 U1.12 ; v1(3175.2,4097.5) 3192.53,4114.83 3192.53,4144.04 C8.2 3195.57,4141 3297.27,4141 U1.64 ; U1.49@3595.03,4143.3 C9.2@3668.73,4143.3 ; v1(3668.5,4182.8) 3668.73,4182.57 C9.2 ; U1.37 v1@3717.7,3846.1
  Bottom Layer w12: C7.2 3672.97,3864.4 3697.9,3864.4 v1(3717.7,3844.6)
  other v1: 3149,3831.89
FTDI_3V3: C2.2 C3.2 C10.2 D2.1 D3.1 FB1.2 FB2.2 R1.2 R9.1 R12.1 U1.20 U1.31 U1.42 U1.50 U1.56 U4.6 U5.2 U5.4 | length 1097.9
  Top Layer w12: v1(3336,3607.2) 3356.42,3627.62 U1.20 U1.20@3356.51,3689.19 ; v1(3433,4031) 3454.84,4052.84 U1.56 ; v1(3531,4030) 3572.86,4071.86 3572.86,4140.81 U1.50 ; v1(3562.47,3743) 3572.86,3732.62 3572.86,3689.19 U1.31 ; v1(3583.4,3944.6) 3670.98,3944.6 U1.42
  Top Layer w20: v1(2970.7,4155.9) 2988.11,4138.49 3028.11,4138.49 R1.2 ; v1(2985.9,4076) 3021.93,4076 FB2.2 ; v1(2998.75,3970.95) 3030.5,3939.2 FB1.2 ; v1(3005.2,3551.6) 3005.2,3617.82 3007.43,3620.05 D3.1 3005.83,3622.35 3005.83,3686.65 D2.1
  Bottom Layer w12: v1(3531,4030) 3532.11,4030 R12.1
  Bottom Layer w20: U5.4 3326.02,3912 R9.1 ; C3.2 C3.2@3362.28,3983.86 ; U4.6 v1(3767.1,4122.6) ; C10.2 3750.7,4042.57 v1(3750.7,4025.1)
  other v1: 3336,3580.3 3309,3580.6 3310,3607.2 3278,3850.96 3313,3850.96 3350,3850.96 3383,3851.32
FTDI_CLK: U1.62 U4.4 | length 467.8
  Top Layer w10: U1.62 3336.73,4197.93 3363.7,4224.9 3672.1,4224.9 v1@3676.8,4220.2
  Bottom Layer w10: 3717.74,4209.34 U4.4
  Bottom Layer w12: v1(3681.9,4221) 3706.08,4221 3717.74,4209.34
FTDI_CS: U1.63 U4.5 | length 651.4
  Top Layer w10: U1.63 3317.05,4208.75 3350.8,4242.5 v1@3768.6,4242.5
  Bottom Layer w10: U4.5 3730.48,4160.8 3758.7,4160.8 3773.7,4175.8 v1(3773.7,4243.3)
FTDI_DATA: R14.2 U1.61 U4.3 | length 371.3
  Top Layer w10: U1.61 3356.42,4179.09 3385.52,4208.2 3573.82,4208.2 v1(3587.1,4194.92)
  Bottom Layer w10: R14.2@3558.3,4170.4 3558.3,4186.8 3567,4195.5 3586.52,4195.5 v1(3587.1,4194.92) 3620.54,4194.92 U4.3@3622.22,4196.6
GND: 
NetC4_2: C4.2 FB1.1 U1.9 | length 224.1
  Top Layer w12: C4.2@3078.47,3879.3 3081.14,3881.97 3081.14,3901.8 3084.5,3905.16 U1.9
  Top Layer w20: C4.2 3078.47,3879.3 FB1.1
NetC5_1: C5.1 FB2.1 U1.4 | length 200.8
  Top Layer w12: C5.1@3077.8,4020.4 3166.71,4020.4 3183.44,4003.68 3219,4003.68 U1.4
  Top Layer w20: C5.1@3077.8,4020.4 3078.37,4020.97 FB2.1
NetC11_2: C11.2 U1.2 Y1.1 | length 355.3
  Top Layer w10: U1.2 3301.56,4042.95 v1(3311.01,4052.4)
  Bottom Layer w10: Y1.1@3280.1,4165.9 3240.3,4165.9 3206.41,4132.01 3206.41,4073.6 3227.61,4052.4 v1(3311.01,4052.4)
NetC12_2: C12.2 U1.3 Y1.3 | length 347.3
  Top Layer w10: U1.3 3317.07,4023.27 v1(3346.1,4052.3)
  Bottom Layer w10: v1(3346.1,4052.3) 3409.6,4052.3 3435.3,4078 3435.3,4112.43 ; Y1.3 3426.68,4120.1 C12.2
NetD1_1: D1.1 R1.1 | length 63.4
  Top Layer w10: R1.1 3079.29,4155.7 3079.43,4155.84 D1.1
NetD2_2: D2.2 R13.2 | length 64.2
  Top Layer w12: D2.2 R13.2
NetD3_2: D3.2 R18.2 | length 65.5
  Top Layer w12: D3.2 R18.2
NetF1_1: F1.1 J1.1
NetJ1_2: J1.2 R2.1 | length 145.6
  Bottom Layer w6: J1.2 2950.04,3866.67 2955.97,3872.6 2978.27,3872.6 2995,3889.33 2995,3911.63 3000.17,3916.8 3018.41,3916.8 R2.1
NetJ1_3: J1.3 R3.1 | length 148.8
  Bottom Layer w6: J1.3 2955.04,3892.26 2962.7,3884.6 2973.3,3884.6 2983,3894.3 2983,3916.6 2995.2,3928.8 3013.71,3928.8 R3.1
NetJ1_S: J1.S R4.2
NetR5_1: R5.1 U1.19 | length 624.1
  Top Layer w10: U1.19@3337.64,3690 3337.64,3727.25 3350.38,3740 3488,3740 v1(3516,3768) ; v1(3625,3689) 3627,3691 v1(3774.8,3691)
  Bottom Layer w10: v1(3516,3768) 3597,3768 3625,3740 v1(3625,3689) ; v1(3774.8,3691) 3813.59,3691 R5.1
NetR6_1: R6.1 U1.17 | length 922.2
  Top Layer w10: U1.17 3297.36,3755.36 3322.63,3780.63 3467.39,3780.63 3496.76,3810 3563.2,3810 3581.1,3792.1 3581.1,3761.9 3629,3714 v1(3879.9,3714)
  Bottom Layer w10: R6.1@3822.3,3848.71 R6.1 3879.9,3816.91 v1(3879.9,3714) ; R6.1@3834.7,3861.4 R6.1@3834.7,3870.31
NetR7_1: R7.1 U1.16 | length 680.3
  Top Layer w10: U1.16 3267.36,3767.36 3302,3802 3457,3802 3486,3831 3569.8,3831 3600.8,3800 3600.8,3772.2 3633,3740 3787.21,3740 R7.1
NetR8_1: R8.1 U1.38 | length 404.1
  Top Layer w10: U1.38 v1@3752.8,3865.79 ; v1(3724.6,3643.6) 3809.21,3643.6 R8.1 ; R8.1@3809.51,3645.3 R8.1@3810.51,3646.3
  Bottom Layer w10: v1(3724.6,3643.6) 3724.6,3751.2 3755.1,3781.7 3755.1,3857 3752.8,3859.3 v1(3752.8,3864.4)
NetR9_2: R9.2 U1.14 | length 387.5
  Top Layer w10: U1.14 3271.73,3806.73 3286,3821 3443,3821 3483,3861 v1(3509,3861)
  Bottom Layer w10: v1(3509,3861) 3525,3861 3544.59,3880.59 R9.2
NetR10_1: R10.1 U1.32 | length 81.7
  Top Layer w12: R10.1 3581.59,3613.97 3592.64,3625.02 U1.32
NetR11_2: R11.2 U1.6 | length 297.7
  Top Layer w10: U1.6 3427.79,3964.21 v1@3451,3941
  Bottom Layer w10: v1(3452,3940) 3452.38,3940 3490.41,3978.03 R11.2
NetR12_2: R12.2 R14.1 U4.1 | length 117.5
  Bottom Layer w12: R14.1@3558.3,4119.22 3618.93,4119.22 3620.65,4117.5 3620.65,4074.57 R12.2@3612.48,4066.4
NetR15_1: R15.1 U1.18 | length 882.5
  Top Layer w10: U1.18 3317.05,3739.05 3337.04,3759.04 3472.04,3759.04 3502,3789 v1(3553,3789) ; v1(3610,3974) 3610,4062 3633.1,4085.1 3769.62,4085.1 3804.52,4050.2 3804.21,3993.38 R15.1@3801.43,3990.64
  Bottom Layer w10: v1(3553,3789) 3553,3853.37 3610,3910.37 v1(3610,3974)
NetR16_1: R16.1 U1.39 | length 142.4
  Top Layer w10: U1.39@3671.81,3886.38 U1.39 3797.64,3885.47 R16.1
NetR17_1: R17.1 U1.21 | length 1108.8
  Top Layer w10: U1.21 3376.1,3604.9 3405,3576 3607,3576 v1(3628,3597) ; v1(3804.3,4162.1) 3806.81,4159.59 R17.1
  Bottom Layer w10: v1(3628,3597) 3642,3583 3725.1,3583 3753.7,3611.6 3753.7,3752.03 3777,3775.33 3777,4093.9 3804.3,4121.2 v1(3804.3,4162.1)
NetU1_40: U1.40 U1.41 | length 19.7
  Top Layer w10: U1.40 U1.41
RxD_LED: R13.1 U1.54 | length 1214.9
  Top Layer w10: R13.1 3215,3652.59 3215,3576 3239,3552 3621,3552 3649,3580 3649,3646 v1(3638,3657) ; U1.54 3494.21,3968.79 3609,3854 v1(3609,3827)
  Bottom Layer w10: v1(3609,3827) 3649,3787 3649,3668 v1(3638,3657)
SCI_RX: CN1.13 R8.2 | length 122.8
  Top Layer w12: R8.2 3906,3644.9 CN1.13 ; CN1.13@3971.32,3589.78 CN1.13@3974.1,3587
SCI_TX: CN1.14 R16.2 | length 440.1
  Top Layer w12: R16.2 3888.5,3875.3 v1(3888.6,3875.4) ; CN1.14@4074.1,3573 CN1.14@4074.1,3587
  Bottom Layer w12: v1(3888.6,3875.4) 3903.3,3860.7 3903.3,3674.6 3938.3,3639.6 4011.3,3639.6 CN1.14
TCK: CN1.11 R7.2 | length 128.4
  Top Layer w10: R7.2 3888.4,3762.5 CN1.11 ; CN1.11@3970.23,3689.34 CN1.11@3971.7,3689.34
TDI: CN1.3 R6.2 | length 286.1
  Bottom Layer w10: R6.2@3824.6,3921 3835.4,3921 3835.4,4059.4 3864,4088 3954.5,4088 CN1.3
TDO: CN1.7 R15.2 | length 163.7
  Top Layer w12: R15.2 3858.99,3951.01 3881.4,3928.6 3922.3,3928.6 CN1.7
TMS: CN1.1 R5.2 | length 532.7
  Bottom Layer w10: R5.2@3823.9,3763.99 3799.5,3788.39 3799.5,4081.6 3910.1,4192.2 CN1.1
TRST: CN1.2 R17.2 | length 229.6
  Top Layer w10: R17.2 3874.79,4142.7 4009.2,4142.7 CN1.2
  Top Layer w12: CN1.2@4070.23,4189.34 CN1.2@4071.7,4189.34
TxD_LED: R18.1 U1.55 | length 1243
  Top Layer w10: R18.1 3181.18,3580.13 3228.41,3532.9 3630.6,3532.9 3672,3574.3 v1(3672,3659) ; U1.55 3474.53,3957.47 v1(3583,3849)
  Bottom Layer w10: v1(3583,3849) 3625.94,3849 3672,3802.94 v1(3672,3659)
USBVCC: C1.2 F1.2 U5.3
pads on no net: CN1.5 CN1.6 CN1.9 J1.4 U1.22 U1.23 U1.24 U1.26 U1.27 U1.28 U1.29 U1.30 U1.33 U1.34 U1.36 U1.43 U1.44 U1.45 U1.46 U1.48 U1.52 U1.53 U1.57 U1.58 U1.59 U1.60 Y1.2 Y1.4

## Polygon pours and split planes (outlines as drawn)
AGND on Bottom Layer "Bottom Layer AGND" (solid, remove dead copper, pour order 19): 2878.5,3494.77 cw(c2878.5,3643.96) 2729.3,3643.96 2729.1,3643.96 2729.1,4120.81 2729.12,4119.91 cw(c2902.61,4119.91) 2902.61,4293.4 3998.1,4293.4 3998.1,4293.5 cw(c3998.1,4143.5) 4148.1,4143.5 4147.8,4143.5 4147.8,3630.9 cw(c4012.4,3630.9) 4012.4,3495.5
NetF1_1 on Bottom Layer "NETF1_1_L04_P002" (solid, pour order 2): 2909.7,3850.8 3013.1,3850.8 3040,3823.9 3040,3732 3040,3599 3015,3574 2883,3574 2870,3587 2870,3765 2902,3797 2902,3843.1
NetJ1_S on Bottom Layer "NETJ1_S_L04_P000" (solid, remove dead copper, pour order 0): 2888.3,4048.74 2888.3,4049.32 2897.73,4059 2897.73,4101.23 2905.3,4108.8 2947.7,4108.8 2956.98,4099.52 2956.98,4039.33 2957.06,3996.36 2947.36,3986.66 2873.44,3986.66 2864.44,3977.66 2864.44,3823.66 2878.44,3806.66 2944.44,3806.66 2957.44,3793.66 2957.44,3737.74 2944.44,3724.66 2801.44,3724.66 2788.44,3737.66 2788.44,4038.66 2798.44,4048.74
FTDI_3V3 on Bottom Layer "FTDI_3V3_L04_P007" (solid, remove dead copper, pour order 7): 3272,4027 3256,4013 3256,3947 3238.7,3929.7 3238.7,3761.3 3284,3716 3284,3581 3295.59,3569.41 3346.41,3569.41 3357,3580 3357,3685 3398,3726 3398,3931 3376,3953 3376,4000 3349,4027
USBVCC on Bottom Layer "USBVCC_L04_P006" (solid, pour order 6): 3150,3729.6 3134,3745.6 3134,3781.31 3121.96,3792.2 3065.2,3792.2 3053,3780 3053,3604 3081.6,3575.4 3238.4,3575.4 3267,3604 3267,3697.7 3235.1,3729.6
AGND on Top Layer "Top Layer AGND" (solid, remove dead copper, pour order 20): 2878.5,3494.77 cw(c2878.5,3643.96) 2729.3,3643.96 2729.1,3643.96 2729.1,4120.81 2729.12,4119.91 cw(c2902.61,4119.91) 2902.61,4293.4 3998.1,4293.4 3998.1,4293.5 cw(c3998.1,4143.5) 4148.1,4143.5 4147.8,4143.5 4147.8,3630.9 cw(c4012.4,3630.9) 4012.4,3495.5
AGND on GND (split plane): 4007.37,4273.15 4016.6,4272.16 4025.73,4270.51 4034.72,4268.22 4043.52,4265.29 4052.1,4261.74 4060.39,4257.58 4068.37,4252.85 4076,4247.56 4083.22,4241.73 4090.01,4235.41 4096.33,4228.62 4102.16,4221.4 4107.45,4213.77 4112.18,4205.79 4116.34,4197.5 4119.89,4188.92 4122.82,4180.12 4125.11,4171.13 4126.76,4162 4127.75,4152.77 4127.98,4146.33 4127.7,4143.5 4127.7,3630.9 4127.76,3630.28 4127.43,3621.85 4126.37,3612.85 4124.6,3603.96 4122.14,3595.24 4119.01,3586.74 4115.21,3578.51 4110.79,3570.61 4105.75,3563.08 4100.14,3555.96 4093.99,3549.31 4087.34,3543.16 4080.22,3537.55 4072.69,3532.52 4064.79,3528.09 4056.56,3524.29 4048.06,3521.16 4039.34,3518.7 4030.45,3516.93 4021.45,3515.87 4013.02,3515.54 4012.4,3515.6 4012.39,3515.6 2878.49,3514.86 2877.79,3514.8 2868.36,3515.17 2858.29,3516.36 2848.34,3518.34 2838.58,3521.09 2829.06,3524.6 2819.85,3528.85 2811,3533.81 2802.56,3539.44 2794.59,3545.72 2787.14,3552.61 2780.26,3560.06 2773.98,3568.02 2768.34,3576.46 2763.39,3585.31 2759.14,3594.52 2755.63,3604.04 2752.87,3613.8 2750.89,3623.75 2749.7,3633.83 2749.33,3643.26 2749.4,3643.96 2749.2,3646.03 2749.2,4119.73 2749.21,4119.91 2749.2,4119.91 2749.2,4120.12 2749.21,4120.3 2749.19,4121.2 2749.17,4121.37 2749.51,4130.86 2750.68,4141.75 2752.63,4152.53 2755.34,4163.15 2758.8,4173.55 2762.99,4183.67 2767.89,4193.47 2773.49,4202.89 2779.73,4211.89 2786.61,4220.42 2794.08,4228.44 2802.1,4235.91 2810.63,4242.78 2819.63,4249.03 2829.05,4254.62 2838.85,4259.53 2848.97,4263.72 2859.37,4267.18 2869.98,4269.89 2880.77,4271.84 2891.66,4273.01 2901.91,4273.37 2902.61,4273.3 3998.1,4273.3 3999.44,4273.44
FTDI_1V8 on POWER (split plane): 3705.7,4179.19 3705.7,3933.2 3706.09,3931.25 3707.2,3929.6 3720.4,3916.4 3755.9,3880.89 3755.9,3833.41 3733.89,3811.4 3658.51,3811.4 3621,3848.91 3621,4050.8 3620.61,4052.75 3619.5,4054.4 3572.8,4101.1 3571.15,4102.21 3569.2,4102.6 3279.1,4102.6 3277.15,4102.21 3275.5,4101.1 3235.6,4061.2 3234.49,4059.55 3234.1,4057.6 3234.1,3798.31 3202.89,3767.1 3123.1,3767.1 3123.1,4144.89 3188.51,4210.3 3674.59,4210.3
FTDI_3V3 on POWER (split plane): 4007.37,4273.15 4016.6,4272.16 4025.73,4270.51 4034.72,4268.22 4043.52,4265.29 4052.1,4261.74 4060.39,4257.58 4068.37,4252.85 4076,4247.56 4083.22,4241.73 4090.01,4235.41 4096.33,4228.62 4102.16,4221.4 4107.45,4213.77 4112.18,4205.79 4116.34,4197.5 4119.89,4188.92 4122.82,4180.12 4125.11,4171.13 4126.76,4162 4127.75,4152.77 4127.98,4146.33 4127.7,4143.5 4127.7,3630.9 4127.76,3630.28 4127.43,3621.85 4126.37,3612.85 4124.6,3603.96 4122.14,3595.24 4119.01,3586.74 4115.21,3578.51 4110.79,3570.61 4105.75,3563.08 4100.14,3555.96 4093.99,3549.31 4087.34,3543.16 4080.22,3537.55 4072.69,3532.52 4064.79,3528.09 4056.56,3524.29 4048.06,3521.16 4039.34,3518.7 4030.45,3516.93 4021.45,3515.87 4013.02,3515.54 4012.4,3515.6 4012.39,3515.6 2878.49,3514.86 2877.79,3514.8 2868.36,3515.17 2858.29,3516.36 2848.34,3518.34 2838.58,3521.09 2829.06,3524.6 2819.85,3528.85 2811,3533.81 2802.56,3539.44 2794.59,3545.72 2787.14,3552.61 2780.26,3560.06 2773.98,3568.02 2768.34,3576.46 2763.39,3585.31 2759.14,3594.52 2755.63,3604.04 2752.87,3613.8 2750.89,3623.75 2749.7,3633.83 2749.33,3643.26 2749.4,3643.96 2749.2,3646.03 2749.2,4119.73 2749.21,4119.91 2749.2,4119.91 2749.2,4120.12 2749.21,4120.3 2749.19,4121.2 2749.17,4121.37 2749.51,4130.86 2750.68,4141.75 2752.63,4152.53 2755.34,4163.15 2758.8,4173.55 2762.99,4183.67 2767.89,4193.47 2773.49,4202.89 2779.73,4211.89 2786.61,4220.42 2794.08,4228.44 2802.1,4235.91 2810.63,4242.78 2819.63,4249.03 2829.05,4254.62 2838.85,4259.53 2848.97,4263.72 2859.37,4267.18 2869.98,4269.89 2880.77,4271.84 2891.66,4273.01 2901.91,4273.37 2902.61,4273.3 3998.1,4273.3 3999.44,4273.44

## Keep-outs
Keep-Out Layer:
  lines w10: 2732.2,3654.02 2732.2,4118.21 ; 2732.22,4117.31 cw(c2905.71,4117.31) 2905.71,4290.8 4000.9,4290.8 ; 2733.1,3653.12 ccw(c2891.46,3650.76) 2889.1,3492.4 4012.4,3492.4 ; 4001.2,4290.9 cw(c4001.2,4140.9) 4151.2,4140.9 ; 4015.5,3492.9 ccw(c4015.5,3628.3) 4150.9,3628.3 4150.9,4140.9

## Other copper
POWER (plane layer: these items are gaps in the copper):
  lines w10: 3118,3762 3118,4147 3186.4,4215.4 3676.7,4215.4 3710.8,4181.3 3710.8,3933.2 3724,3920 3761,3883 3761,3831.3 3736,3806.3 3656.4,3806.3 3615.9,3846.8 3615.9,4050.8 3569.2,4097.5 3279.1,4097.5 3239.2,4057.6 3239.2,3796.2 3205,3762 3118,3762

## Silkscreen, mask and mechanical layers (free items; w line width, h text height)
Top Overlay:
  circle w10: c3958.7,4192.2 r46.2
  lines w9.84: 3898.7,3536 3898.7,4243.8 4076.9,4243.8 4112.7,4208 4112.7,3571.9 4076.8,3536 3898.7,3536
  text "Xds100v2 简易迷你版(无隔离无保护)" at 2824.1,4389.8 h60
  text "PWR" at 2857.2,4182 h55
  text "Rx" at 2881.3,3661.4 h70
  text "Tx" at 2885.6,3598.4 h70
Mechanical 1:
  lines w1: 2729.1,3643.96 2729.1,4120.81 ; 2729.12,4119.91 cw(c2902.61,4119.91) 2902.61,4293.4 3998.1,4293.4 ; 2729.3,3643.96 ccw(c2878.5,3643.96) 2878.5,3494.77 ; 2878.5,3495.01 4012.4,3495.5 ccw(c4012.4,3630.9) 4147.8,3630.9 4147.8,4143.5 ; 3998.1,4293.5 cw(c3998.1,4143.5) 4148.1,4143.5